# Altium PCB High_Power_Board_v3.PcbDoc
Units mm, origin at the board's own origin, x right, y up, seen from the top; angles counter-clockwise.
Board outline 370 x 200 mm, 2 copper layers (Top Layer, Bottom Layer); 4 components, 0 nets, 4 pads, 0 vias.
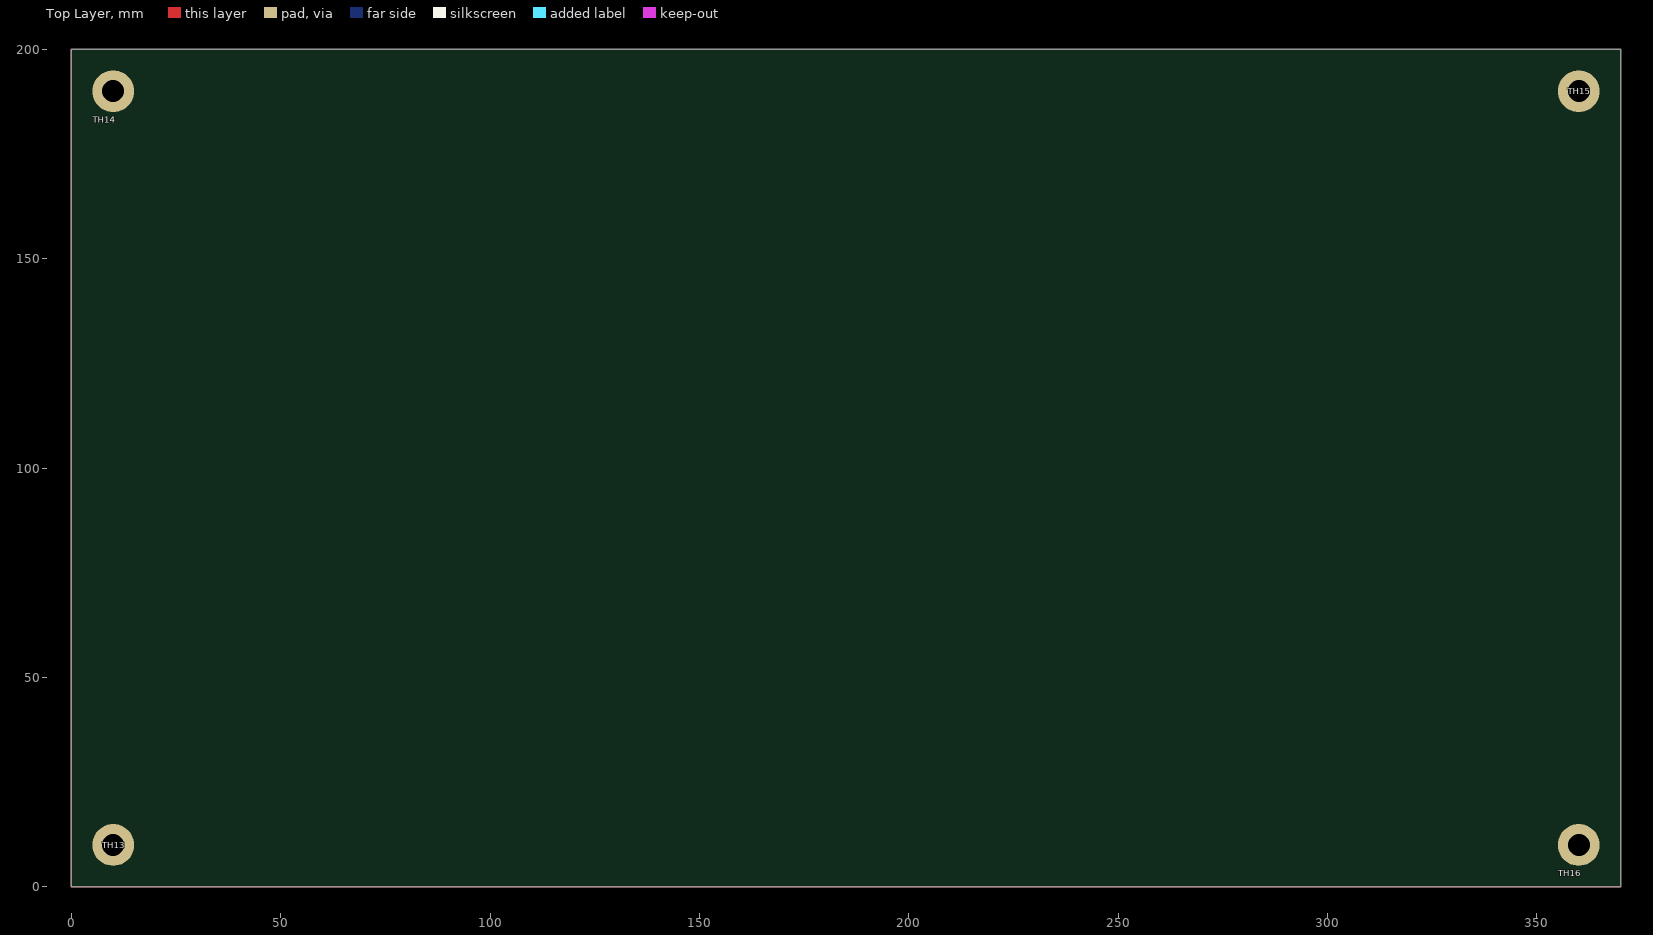
[diagram p0: Top Layer view]
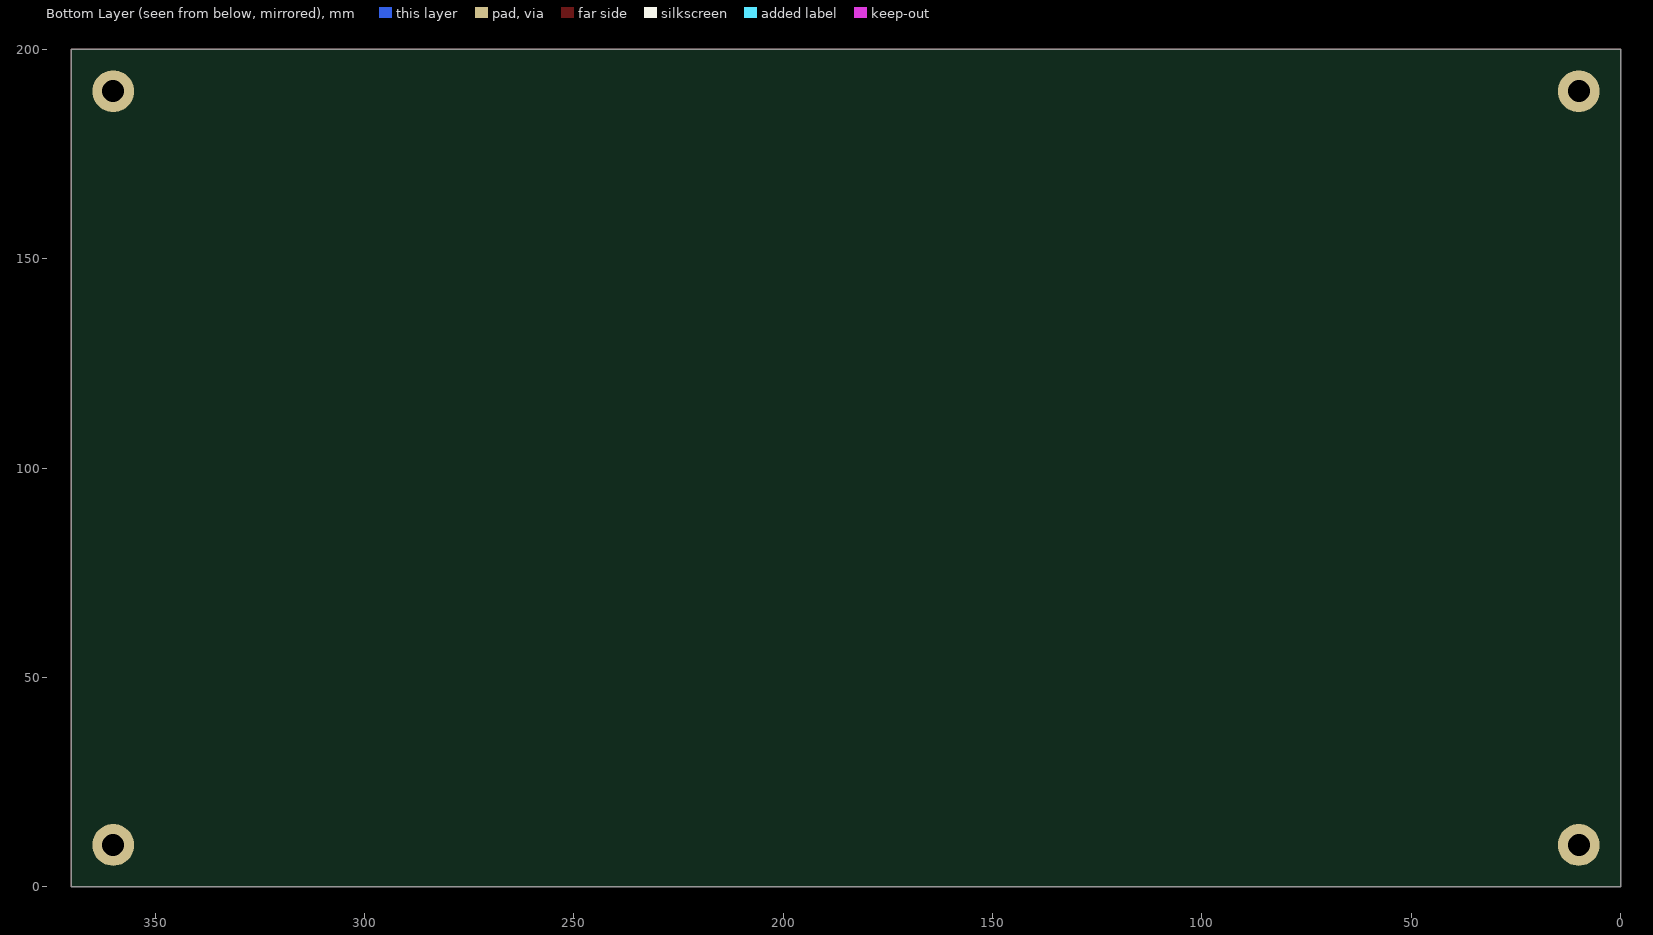
[diagram p1: Bottom Layer view, seen from below]

## Layer stack, top to bottom
Top Solder: solder mask 0.0102, Solder Resist, Dk 3.5
Top Layer: signal copper 0.0356
Dielectric 1: dielectric 0.32, FR-4, Dk 4.8
Bottom Layer: signal copper 0.0356
Bottom Solder: solder mask 0.0102, Solder Resist, Dk 3.5

## Board outline
0,0 0,200 370,200 370,0

## Design rules (kind name [scope] priority, off if disabled: settings)
Clearance [All] p1: gap=0.254 ignorepadtopadclearanceinfootprint=FALSE except(0: Arc-Hole Track-Hole SMDPad-Hole THPad-Hole Via-Hole Fill-Hole Poly-Hole Region-Hole Text-Hole)
PolygonConnect [All] p1: connectstyle=Relief reliefconductorwidth=0.254 reliefentries=4 polygonreliefangle="90 Angle" airgapwidth=0.254
RoomDefinition Mounting_Holes_2 [InComponentClass('Mounting_Holes 2')] p1: confinementstyle=ConfineIn formatcopy=TRUE lockcomponents=TRUE outline 4.546,184.546 4.546,195.454 15.454,195.454 15.454,184.546
RoomDefinition Mounting_Holes_1 [InComponentClass('Mounting_Holes 1')] p2: confinementstyle=ConfineIn formatcopy=TRUE lockcomponents=TRUE outline 354.546,184.546 354.546,195.454 365.454,195.454 365.454,184.546
RoomDefinition Mounting_Holes_3 [InComponentClass('Mounting_Holes 3')] p3: confinementstyle=ConfineIn formatcopy=TRUE lockcomponents=TRUE outline 354.546,4.546 354.546,15.454 365.454,15.454 365.454,4.546
RoomDefinition Mounting_Holes [InComponentClass('Mounting_Holes')] p4: confinementstyle=ConfineIn formatcopy=TRUE lockcomponents=TRUE outline 4.546,4.546 4.546,15.454 15.454,15.454 15.454,4.546
RoutingVias [All] p1: holewidth=0.711 width=1.27 viastyle="Through Hole" minholewidth=0.711 minwidth=1.27 maxholewidth=0.711 maxwidth=1.27
SolderMaskExpansion [All] p1: expansion=0.102 istentingtop=FALSE
Width [All] p1: maxlimit=0.254 minlimit=0.254 preferedwidth=0.254
30 further rules are at their usual default settings.

## Classes and differential pairs
component class Mounting_Holes: TH13

## Components (designator, comment, footprint, x,y, rotation, side; value= is the part's Value field where it differs from the comment)
TH13 "M5-Screw-Hole" M5_Screw_Hole#1 8,8 r0 top (schematic designator TH1)
TH14 "M5-Screw-Hole" M5_Screw_Hole#2 368.173,6.985 r0 top (schematic designator TH2)
TH15 "M5-Screw-Hole" M5_Screw_Hole#3 185.398,355.278 r0 top (schematic designator TH3)
TH16 "M5-Screw-Hole" M5_Screw_Hole#4 391.541,6.985 r0 top (schematic designator TH4)

## Footprints (in the part's own frame and the unit in brackets; to place one, negate y for a bottom-side part, rotate by r counter-clockwise, add the part's x,y. Pads: shape width x height; smd on the part's side, far side on the other; paste and mask are expansions set on the pad)
M5_Screw_Hole#1 [mm]
  round 10 hole 5.25 mask+0.2: 1(2,2)
M5_Screw_Hole#2 [mm]
  round 10 hole 5.25 mask+0.2: 1(-358.173,183.015)
M5_Screw_Hole#3 [mm]
  round 10 hole 5.25 mask+0.2: 1(174.602,-165.278)
M5_Screw_Hole#4 [mm]
  round 10 hole 5.25 mask+0.2: 1(-31.541,3.015)

## Nets (pads, with @x,y where several pads share a name; then routed paths per layer and width w, separated by ;. In a path a pad name is that pad's centre, name@x,y a point inside that pad or via, vN(x,y) a via of type N, cw(c..) or ccw(c..) an arc to the next point about the centre after c; other vN are vias at no path point)
pads on no net: TH13.1 TH14.1 TH15.1 TH16.1
copper on no net: | length 1140
  Top Layer w0.254: 0,0 370,0 370,200 0,200 0,0